# Altium PCB POWER_PCB_v2.PcbDoc (part 1 of 2)
Units mm, origin at the board's own origin, x right, y up, seen from the top; angles counter-clockwise.
Board outline 44.96 x 8.26 mm, 4 copper layers (Top Layer, Layer 1, Layer 2, Bottom Layer), stack 0.797 mm thick; 88 components, 59 nets, 290 pads, 126 vias.
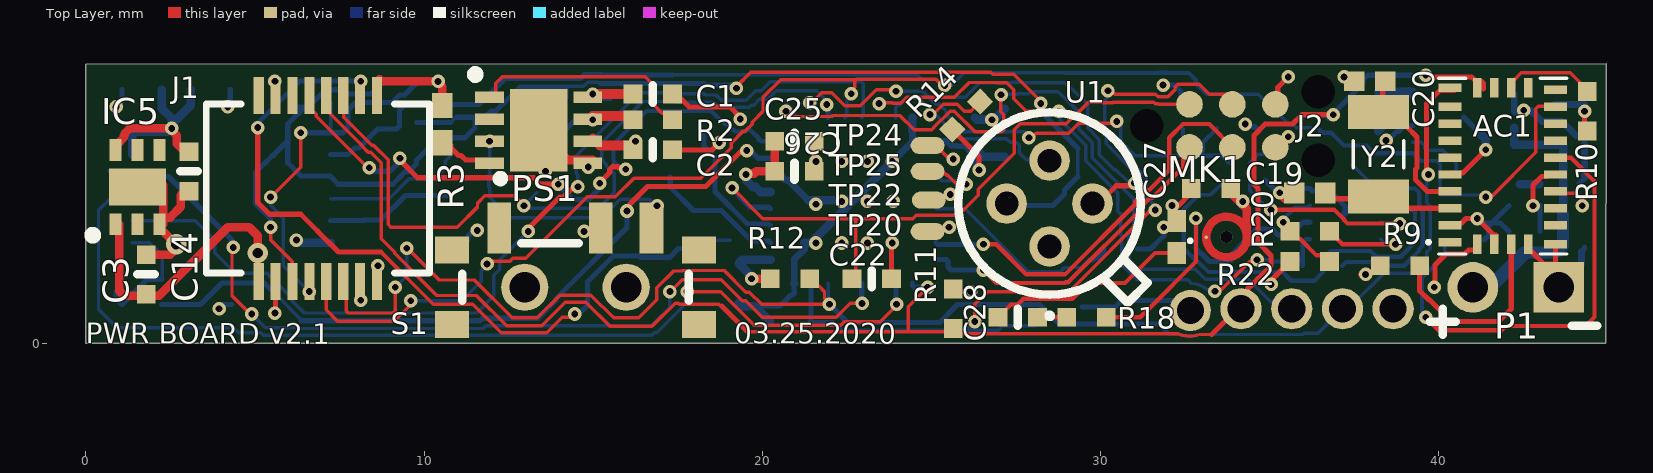
[diagram p0: Top Layer view]
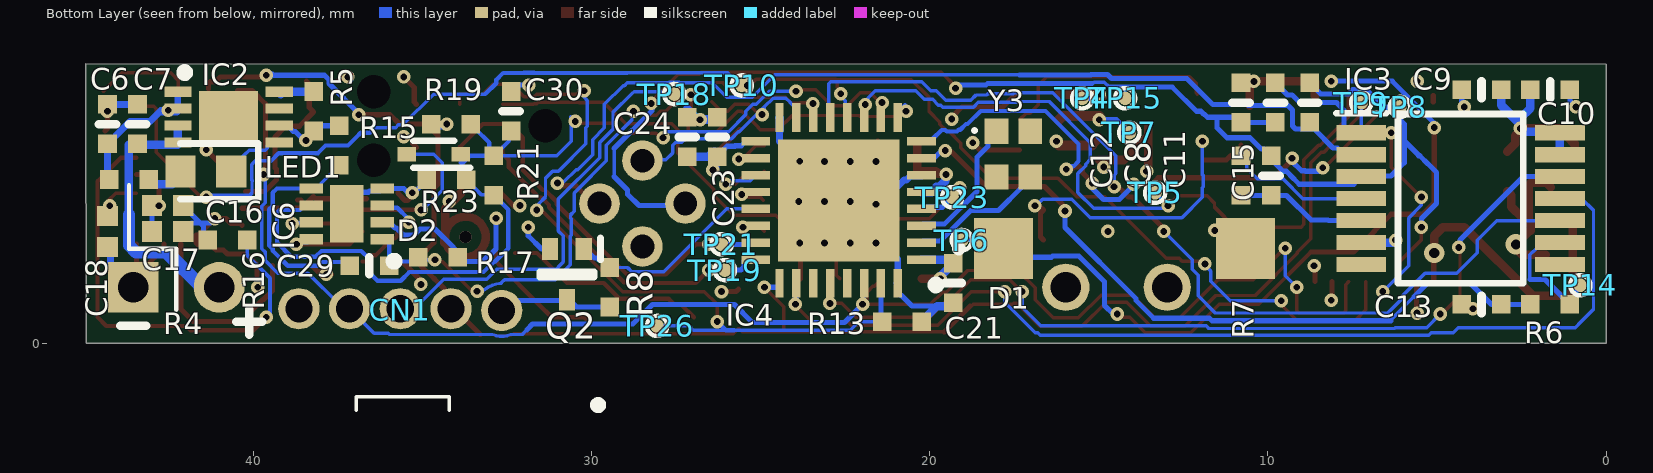
[diagram p1: Bottom Layer view, seen from below]
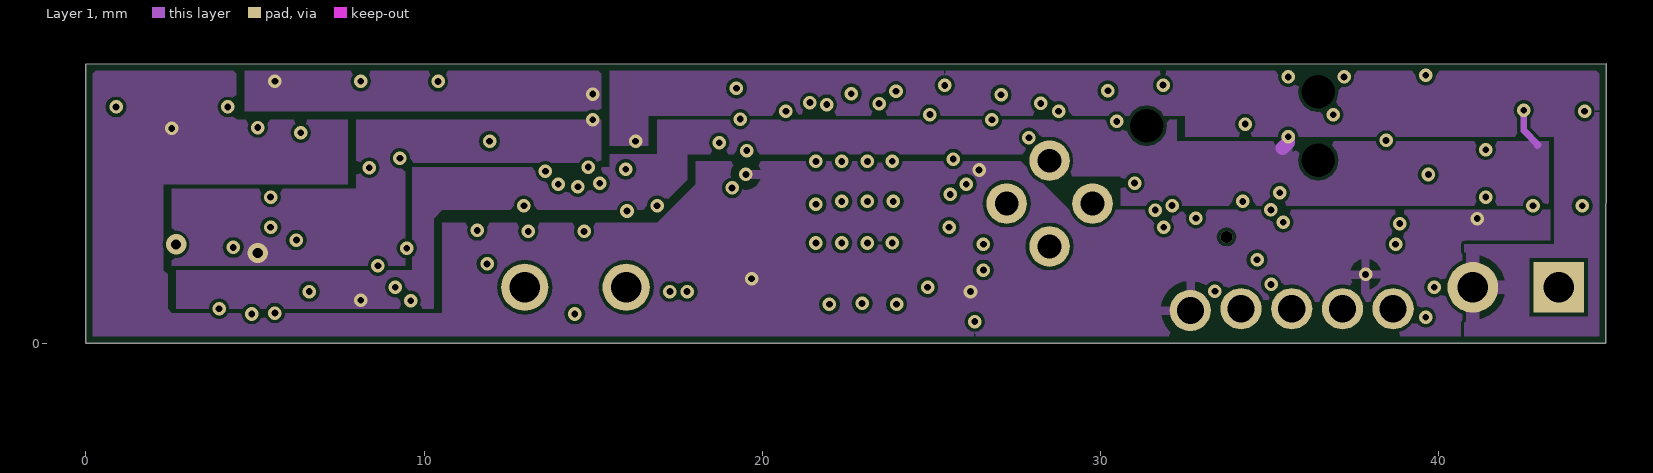
[diagram p2: Layer 1]
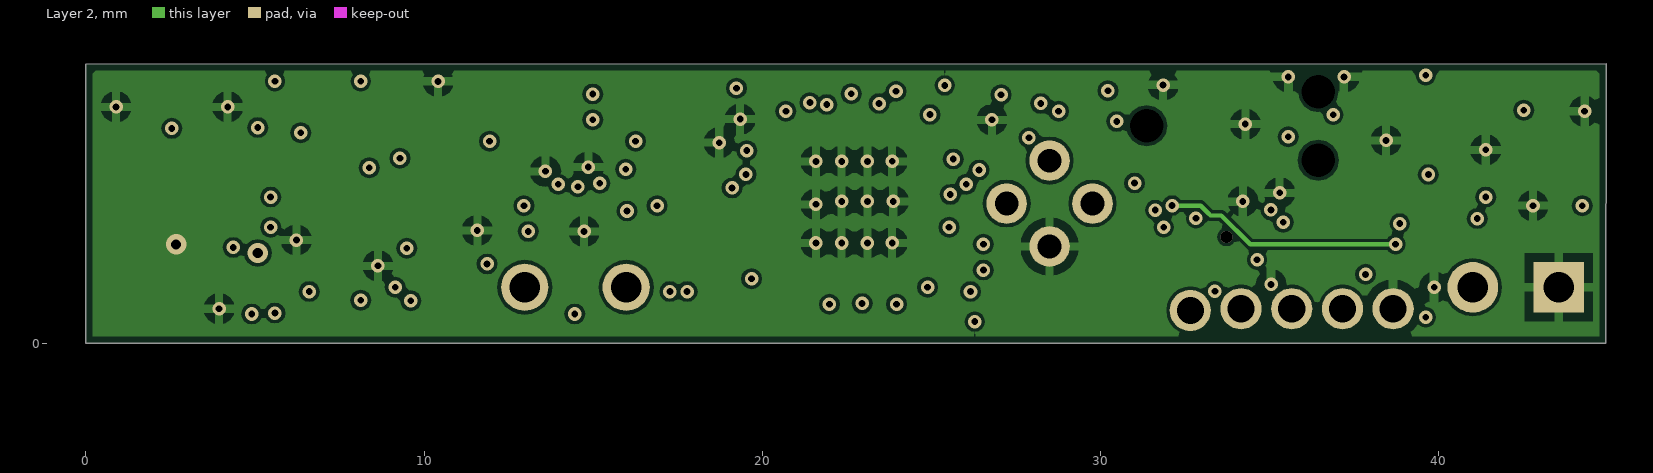
[diagram p3: Layer 2]
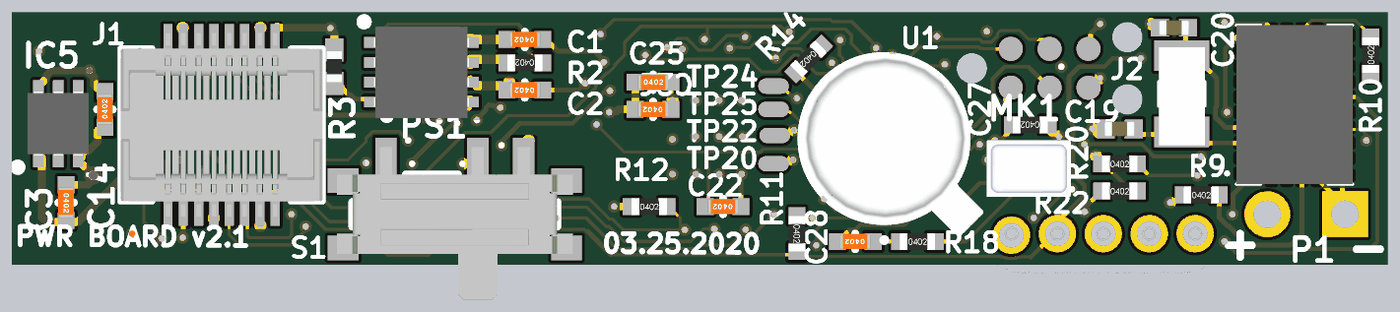
[diagram p5: 3D render of the assembled board from above, using the file's embedded part models]
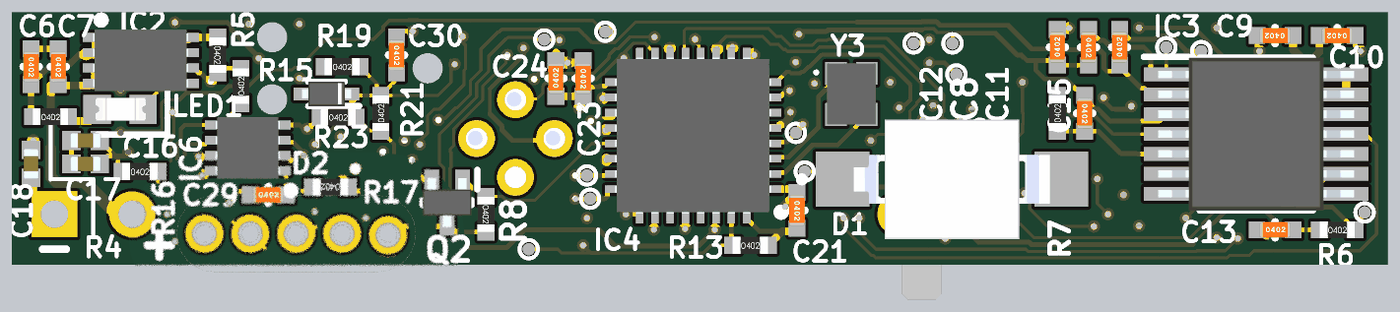
[diagram p6: 3D render of the assembled board from below, using the file's embedded part models]

## Layer stack, top to bottom
Top Solder: solder mask 0.0102, Solder Resist, Dk 3.5
Top Layer: signal copper 0.0356
Dielectric 2: prepreg 0.168, PP-006, Dk 4.1
Layer 1: signal copper 0.035
Dielectric 1: dielectric 0.32, FR-4, Dk 4.8
Layer 2: signal copper 0.035
Dielectric 3: prepreg 0.168, PP-006, Dk 4.1
Bottom Layer: signal copper 0.0356
Bottom Solder: solder mask 0.0102, Solder Resist, Dk 3.5

## Board outline
0,0 0,8.255 44.959,8.255 44.956,0

## Design rules (kind name [scope] priority, off if disabled: settings)
BoardOutlineClearance [All] p1: gap=0.2 ignorepadtopadclearanceinfootprint=FALSE
Clearance [All] p1: gap=0.102 ignorepadtopadclearanceinfootprint=FALSE except(0: Arc-Hole Track-Hole SMDPad-Hole THPad-Hole Via-Hole Fill-Hole Poly-Hole Region-Hole Text-Hole)
PlaneConnect PlaneConnect_1 [InNet('3.3V_PWR') or InNet('VBAT') or InNet('GND') or InNet('VBAT_MUX') or InNet('VBAT_2')] p1: planeconnectstyle=Direct reliefexpansion=0.508 reliefentries=4 reliefconductorwidth=0.254 reliefairgap=0.254
PlaneConnect [All] p2: planeconnectstyle=Relief reliefexpansion=0.508 reliefentries=4 reliefconductorwidth=0.254 reliefairgap=0.254
PolygonConnect [All] p1: connectstyle=Relief reliefconductorwidth=0.254 reliefentries=4 polygonreliefangle="90 Angle" airgapwidth=0.254
RoutingVias [All] p1: holewidth=0.2 width=0.4 viastyle="Through Hole" minholewidth=0.2 minwidth=0.4 maxholewidth=0.711 maxwidth=1.27
SolderMaskExpansion [All] p1: expansion=0.102 istentingtop=FALSE
Width PWR [InNet('GND') OR InNet('3.3V_PWR')OR InNet('5V') OR InNet('VBAT_MUX')OR InNet('VBAT_1')OR InNet('VBAT_2')] p1: maxlimit=0.356 minlimit=0.152 preferedwidth=0.254 minimp=50.000000 maximp=50.000000 favimp=50.000000
Width [All] p2: maxlimit=0.356 minlimit=0.102 preferedwidth=0.152 midlayer1_maxwidth=0.254 midlayer2_maxwidth=0.254 minimp=50.000000 maximp=50.000000 favimp=50.000000
29 further rules are at their usual default settings.

## Classes and differential pairs
component class Sch_MCU: C21 C22 C23 C24 C25 C26 IC4 J1 J2 R11 R12 R13 TP5 TP6 TP7 TP8 TP9 TP10 TP18 TP19 TP20 TP21 TP22 TP23 TP24 TP25 TP26 Y3
component class sch_sensors: AC1 C8 C9 C10 C11 C12 C13 C15 C16 C17 C18 C19 C20 C27 C28 C29 C30 D1 D2 IC3 IC6 MK1 R6 R7 R9 R10 R14 R15 R16 R17 R18 R19 R20 R21 R22 R23 TP14 TP15 U1 Y2
component class Sch_pwr_sys: C1 C2 C3 C6 C7 C14 CN1 IC2 IC5 LED1 P1 PS1 Q2 R2 R3 R4 R5 R8 S1 TP4

## Components (designator, comment, footprint, x,y, rotation, side; value= is the part's Value field where it differs from the comment)
AC1 "BNO080" BNO080 41.731,5.236 r180 top
C1 "0.10µF" SMD-0402C 16.764,7.366 r90 top
C2 "0.10µF" SMD-0402C 16.764,5.715 r90 top
C3 "1µF" SMD-0402C 1.778,2.032 r180 top
C6 "4.7µF" SMD-0402C 44.323,6.477 r0 bottom
C7 "4.7µF" SMD-0402C 43.434,6.477 r0 bottom
C8 "10000pF" SMD-0402C 9.779,7.112 r0 bottom
C9 "10000pF" SMD-0402C 3.683,7.493 r90 bottom
C10 "10µF" SMD-0402C 1.651,7.493 r90 bottom
C11 "10000pF" SMD-0402C 8.763,7.112 r180 bottom
C12 "10000pF" SMD-0402C 10.795,7.112 r180 bottom
C13 "1µF" SMD-0402C 3.683,1.143 r270 bottom
C14 "1µF" SMD-0402C 3.048,5.08 r0 top
C15 "6800pF" SMD-0402C 9.906,4.953 r0 bottom
C16 "0.10µF" CAPC1005X55N#1 42.545,4.064 r0 bottom
C17 "0.10µF" CAPC1005X55N#1 42.545,3.302 r0 bottom
C18 "0.10µF" CAPC1005X55N#1 44.323,3.302 r270 bottom
C19 "15pF" CAPC1005X55N#1 36.195,4.445 r180 top
C20 "15pF" CAPC1005X55N#2 37.973,7.747 r180 top
C21 "0.10µF" SMD-0402C 19.304,1.778 r0 bottom
C22 "0.10µF" SMD-0402C 23.241,1.905 r90 top
C23 "4.7µF" SMD-0402C 26.289,6.096 r0 bottom
C24 "0.10µF" SMD-0402C 27.178,6.096 r180 bottom
C25 "10000pF" SMD-0402C 20.955,5.969 r270 top
C26 "1µF" SMD-0402C 20.955,5.08 r90 top
C27 "1µF" SMD-0402-RES 33.274,4.572 r90 top
C28 "4.7µF" SMD-0402C 27.559,0.762 r90 top
C29 "4.7µF" SMD-0402C 36.576,2.286 r270 bottom
C30 "10µF" SMD-0402C 32.385,6.858 r0 bottom
CN1 "XNT-005MF-05A" XNT-005MF-05A 35.663,1.016 r0 bottom
D1 "VBPW34FASR" VBPW34FASR 14.243,2.794 r180 bottom
D2 "1N4148X-TP" SODFL1608X70N 34.671,5.588 r0 bottom
IC2 "MCP73831T-2ACI_MC" SON50P300X200X100-9N-D 40.743,6.684 r180 bottom
IC3 "LMP91051MT_NOPB" SOP65P640X120-14N 4.301,4.273 r180 bottom
IC4 "STM32F301K6U6" QFN50P500X500X60-33N-D 22.696,4.219 r0 bottom
IC5 "MCP1700T-3302E_MAY" SON65P200X200X90-7N 1.524,4.615 r90 top
IC6 "TLV9062IDSGT" SON50P200X200X80-9N 37.245,3.822 r0 bottom
J1 "54722-0164" 54722-0164 6.858,4.572 r180 top
J2 "TC2030-CTX-NL" TC2030MCPNL10 33.909,6.223 r0 top
LED1 "SML-E12M8WT86" LEDC1608X46N 41.414,5.08 r0 bottom
MK1 "SPV1840LR5H-B" *MIC_SPV1840LR5H-B 33.734,3.141 r90 top
P1 "Header 2" HDR1X2 43.561,1.651 r180 top
PS1 "TPS2115ADRBR" SON65P300X300X100-9N-D 13.388,6.294 r0 top
Q2 "RE1C002ZPTL" SOTFL50P160X85-3N 30.734,2.032 r270 bottom
R2 "1M" SMD-0402-RES 16.764,6.604 r90 top
R3 "750" RESC1005X40N 10.541,6.477 r270 top
R4 "110" SMD-0402-RES 43.688,4.838 r270 bottom
R5 "17.4k" SMD-0402-RES 38.227,6.858 r0 bottom
R6 "1k" SMD-0402-RES 1.651,1.143 r270 bottom
R7 "160k" SMD-0402-RES 10.795,4.953 r180 bottom
R8 "1M" SMD-0402-RES 29.464,1.651 r0 bottom
R9 "10k" SMD-0402-RES 38.862,2.286 r270 top
R10 "0" SMD-0402-RES 44.399,6.858 r0 top
R11 "10k" SMD-0402-RES 25.654,1.016 r180 top
R12 "10k" SMD-0402-RES 20.828,1.905 r270 top
R13 "10k" SMD-0402-RES 20.828,0.635 r270 bottom
R14 "100k" SMD-0402-RES 26.035,6.731 r135 top
R15 "4.7k" SMD-0402-RES 37.465,5.842 r180 bottom
R16 "10k" SMD-0402-RES 40.767,3.048 r270 bottom
R17 "100k" SMD-0402-RES 34.544,2.54 r90 bottom
R18 "4.7k" SMD-0402-RES 29.591,0.762 r270 top
R19 "100k" SMD-0402-RES 34.163,6.477 r270 bottom
R20 "100k" SMD-0402-RES 36.195,3.302 r270 top
R21 "100k" SMD-0402-RES 32.893,4.953 r180 bottom
R22 "100k" SMD-0402-RES 36.195,2.413 r270 top
R23 "51.1k" SMD-0402-RES 34.29,4.826 r270 bottom
S1 "PCM12SMTR" PCM12SMTR_1 14.478,1.651 r0 top
TP4 "TestPoint" TESTPOINT_0.4MM 15.494,7.239 r90 bottom
TP5 "TestPoint" TESTPOINT_0.4MM 13.335,4.445 r90 bottom
TP6 "TestPoint" TESTPOINT_0.4MM 19.05,3.048 r90 bottom
TP7 "TestPoint" TESTPOINT_0.4MM 14.097,6.223 r90 bottom
TP8 "TestPoint" TESTPOINT_0.4MM 6.096,6.985 r90 bottom
TP9 "TestPoint" TESTPOINT_0.4MM 7.239,7.112 r90 bottom
TP10 "TestPoint" TESTPOINT_0.4MM 25.565,7.62 r90 bottom
TP14 "TestPoint" TESTPOINT_0.4MM 0.76,1.71 r90 bottom
TP15 "TestPoint" TESTPOINT_0.4MM 14.224,7.239 r90 bottom
TP18 "TestPoint" TESTPOINT_0.4MM 27.559,7.366 r90 bottom
TP19 "TestPoint" TESTPOINT_0.4MM 26.063,2.159 r90 bottom
TP20 "TestPoint" TESTPOINT_1MM_OVAL 24.892,3.302 r90 top
TP21 "TestPoint" TESTPOINT_0.4MM 26.162,2.921 r90 bottom
TP22 "TestPoint" TESTPOINT_1MM_OVAL 24.93,4.229 r90 top
TP23 "TestPoint" TESTPOINT_0.4MM 19.338,4.314 r90 bottom
TP24 "TestPoint" TESTPOINT_1MM_OVAL 24.892,5.08 r90 top
TP25 "TestPoint" TESTPOINT_1MM_OVAL 24.892,5.842 r90 top
TP26 "TestPoint" TESTPOINT_0.4MM 28.067,0.508 r90 bottom
U1 "ZTP-135SR" ZTP-135SR 28.5,4.127 r180 top
Y2 "FC-135_32.7680KA-A5" FC135327680KAAG0 38.227,5.588 r90 top
Y3 "XRCGB32M000F1H01R0" XRCGB32M000F1H01R0 17.526,5.588 r270 bottom

## Footprints (in the part's own frame and the unit in brackets; to place one, negate y for a bottom-side part, rotate by r counter-clockwise, add the part's x,y. Pads: shape width x height; smd on the part's side, far side on the other; paste and mask are expansions set on the pad)
54722-0164 [mm]
  rect 0.3x1.1 smd: 1(-1.75,-2.75) 2(-1.75,2.75) 3(-1.25,-2.75) 4(-1.25,2.75) 5(-0.75,-2.75) 6(-0.75,2.75) 7(-0.25,-2.75) 8(-0.25,2.75) 9(0.25,-2.75) 10(0.25,2.75) 11(0.75,-2.75) 12(0.75,2.75) 13(1.25,-2.75) 14(1.25,2.75) 15(1.75,-2.75) 16(1.75,2.75)
  silkscreen extent -3.3,-2.5 3.3,2.5, body extent -3.3,-3 3.3,3, height 1.18
*MIC_SPV1840LR5H-B [mm]
  rect 0.65x0.545 smd: 1(0.473,1.477) 2(-0.474,1.476)
  round 0.1 smd paste-140 mask+0: 3(-0.01,0.6)
  Top Layer circle w0.25: c0,0 r0.6
  body extent -0.92,-0.87 0.93,1.88, height 0.9
BNO080 [mm]
  rect 0.675x0.25 smd: 1(1.387,2.25) 6(-1.738,2.313) 7(-1.738,1.75) 8(-1.738,1.25) 9(-1.738,0.75) 10(-1.738,0.25) 11(-1.738,-0.25) 12(-1.738,-0.75) 13(-1.738,-1.25) 14(-1.738,-1.75) 15(-1.738,-2.263) 20(1.387,-2.313) 21(1.387,-1.75) 22(1.387,-1.25) 23(1.387,-0.75) 24(1.387,-0.25) 25(1.387,0.25) 26(1.387,0.75) 27(1.387,1.25) 28(1.387,1.75)
  rect 0.25x0.575 smd: 2(0.575,2.313) 3(0.075,2.313) 4(-0.425,2.313) 5(-0.925,2.313) 16(-0.925,-2.313) 17(-0.425,-2.313) 18(0.075,-2.313) 19(0.575,-2.313)
  silkscreen extent -2.07,-2.6 2.07,2.6, body extent -2.07,-2.6 1.73,2.6, height 1.28
CAPC1005X55N#1 [mm]
  rect 0.6x0.62 smd: 1(-0.46,0) 2(0.46,0)
  body extent -0.5,-0.25 0.5,0.25, height 0.55
CAPC1005X55N#2 [mm]
  rect 0.6x0.569 smd: 1(-0.46,0) 2(0.46,0)
  body extent -0.5,-0.25 0.5,0.25, height 0.55
FC135327680KAAG0 [mm]
  rect 1x1.8 smd: 1(-1.25,0) 2(1.25,0)
  silkscreen extent -0.4,-0.75 0.4,0.75, body extent -1.68,-0.76 1.52,0.74, height 0.9
HDR1X2 [mm] "Connector; Header; 2 Position"
  rect 1.5x1.5 hole 0.9: 1(0,0)
  round 1.5 hole 0.9: 2(2.54,0)
LEDC1608X46N [mm]
  rect 0.9x0.95 smd: 1(-0.75,0) 2(0.75,0)
  silkscreen extent -1.55,-0.82 0.75,0.82, body extent -0.84,-0.37 0.81,0.36, height 0.68
PCM12SMTR_1 [mm]
  rect 0.7x1.5 smd: 1(-2.25,1.75) 2(0.75,1.75) 3(2.25,1.75)
  rect 1x0.8 smd: 4(-3.65,1.1) 5(-3.65,-1.1) 6(3.65,1.1) 7(3.65,-1.1)
  round 1.4 hole 0.9: 8(-1.5,0) 9(1.5,0)
  silkscreen extent -3.35,-0.4 3.35,3.32, body extent -3.85,-2.8 3.85,2.2, height 1.4
QFN50P500X500X60-33N-D [mm]
  rect 0.85x0.25 smd: 1(-2.45,1.75) 2(-2.45,1.25) 3(-2.45,0.75) 4(-2.45,0.25) 5(-2.45,-0.25) 6(-2.45,-0.75) 7(-2.45,-1.25) 8(-2.45,-1.75) 17(2.45,-1.75) 18(2.45,-1.25) 19(2.45,-0.75) 20(2.45,-0.25) 21(2.45,0.25) 22(2.45,0.75) 23(2.45,1.25) 24(2.45,1.75)
  rect 0.25x0.85 smd: 9(-1.75,-2.45) 10(-1.25,-2.45) 11(-0.75,-2.45) 12(-0.25,-2.45) 13(0.25,-2.45) 14(0.75,-2.45) 15(1.25,-2.45) 16(1.75,-2.45) 25(1.75,2.45) 26(1.25,2.45) 27(0.75,2.45) 28(0.25,2.45) 29(-0.25,2.45) 30(-0.75,2.45) 31(-1.25,2.45) 32(-1.75,2.45)
  rect 3.6x3.6 smd: 33(0,0)
  silkscreen extent -3,2.38 -2.75,2.62, body extent -2.55,-2.55 2.55,2.55, height 0.6
RESC1005X40N [mm]
  rect 0.75x0.6 smd: 1(-0.55,0) 2(0.55,0)
  body extent -0.5,-0.25 0.5,0.25, height 0.4
SMD-0402-RES [mm]
  rect 0.55x0.55 smd: 1(0,0.584) 2(0,-0.584)
  body extent -0.28,-0.57 0.27,0.58, height 0.41
SMD-0402C [mm]
  rect 0.55x0.55 smd: 1(0,0.584) 2(0,-0.584)
  silkscreen extent -0.25,0 0.25,0, body extent -0.25,-0.51 0.25,0.51, height 0.51
SODFL1608X70N [mm]
  rect 0.54x0.42 smd: 1(-0.8,0) 2(0.8,0)
  silkscreen extent -1.07,-0.4 0.6,0.4, body extent -0.8,-0.4 0.8,0.4, height 0.7
SON50P200X200X80-9N [mm]
  rect 0.7x0.3 smd: 1(-1.05,0.75) 2(-1.05,0.25) 3(-1.05,-0.25) 4(-1.05,-0.75) 5(1.05,-0.75) 6(1.05,-0.25) 7(1.05,0.25) 8(1.05,0.75)
  rect 1x1.7 smd: 9(0,0)
  silkscreen extent -1.52,1.28 -1.27,1.52, body extent -1.05,-1 1.05,1, height 0.8
SON50P300X200X100-9N-D [mm]
  rect 0.8x0.3 smd: 1(-1.5,0.75) 2(-1.5,0.25) 3(-1.5,-0.25) 4(-1.5,-0.75) 5(1.5,-0.75) 6(1.5,-0.25) 7(1.5,0.25) 8(1.5,0.75)
  rect 1.75x1.55 smd: 9(0,0)
  silkscreen extent -1.42,1.19 -1.17,1.44, body extent -1.55,-1 1.55,1, height 1
SON65P200X200X90-7N [mm]
  rect 0.65x0.35 smd: 1(-1.1,0.65) 2(-1.1,0) 3(-1.1,-0.65) 4(1.1,-0.65) 5(1.1,0) 6(1.1,0.65)
  rect 1.1x1.7 smd: 7(0,0)
  silkscreen extent -1.55,1.2 -1.3,1.45, body extent -1.05,-1 1.05,1, height 0.9
SON65P300X300X100-9N-D [mm]
  rect 0.85x0.35 smd: 1(-1.45,0.975) 2(-1.45,0.325) 3(-1.45,-0.325) 4(-1.45,-0.975) 5(1.45,-0.975) 6(1.45,-0.325) 7(1.45,0.325) 8(1.45,0.975)
  rect 1.7x2.45 smd: 9(0,0)
  silkscreen extent -2,1.53 -1.75,1.77, body extent -1.55,-1.5 1.55,1.5, height 1
SOP65P640X120-14N [mm]
  rect 1.475x0.45 smd: 1(-2.938,1.95) 2(-2.938,1.3) 3(-2.938,0.65) 4(-2.938,0) 5(-2.938,-0.65) 6(-2.938,-1.3) 7(-2.938,-1.95) 8(2.938,-1.95) 9(2.938,-1.3) 10(2.938,-0.65) 11(2.938,0) 12(2.938,0.65) 13(2.938,1.3) 14(2.938,1.95)
  silkscreen extent -3.67,-2.5 1.85,2.52, body extent -3.2,-2.5 3.2,2.5, height 1.2
SOTFL50P160X85-3N [mm]
  rect 0.645x0.48 smd: 1(-0.752,0.5) 2(-0.752,-0.5) 3(0.752,0)
  silkscreen extent -1.07,-0.8 0.08,0.99, body extent -0.8,-0.8 0.8,0.8, height 0.85
TC2030MCPNL10 [mm]
  round 0.787 smd: 1(-1.27,-0.434) 2(-1.27,0.836) 3(0,-0.434) 4(0,0.836) 5(1.27,-0.434) 6(1.27,0.836)
  round 0.495 hole 0.991 unplated: 7(-2.54,0.201) 8(2.54,1.217) 9(2.54,-0.815)
  silkscreen extent -1.3,-3.25 -1.2,-3.15
TESTPOINT_0.4MM [mm]
  round 0.4 smd: 1(0,0)
  silkscreen extent -0.3,-0.3 0.3,0.3
TESTPOINT_1MM_OVAL [mm]
  oval 0.5x1 smd: 1(0,0)
VBPW34FASR [mm]
  rect 1.75x1.8 smd: 1(-3.575,0) 2(3.575,0)
  silkscreen extent -5,-0.1 -4.8,0.1, body extent -3.2,-1.95 3.2,1.95, height 1.51
XNT-005MF-05A [mm]
  round 1.219 hole 0.8: 1(-3,0.05) 2(-1.5,0) 3(0,0) 4(1.5,0) 5(3,0)
  silkscreen extent -5.96,2.6 1.3,3, body extent -5.5,-2.65 5.5,2.65, height 3.65
XRCGB32M000F1H01R0 [mm]
  rect 0.75x0.7 smd: 1(-0.675,-0.5) 2(0.675,-0.5) 3(0.675,0.5) 4(-0.675,0.5)
  silkscreen extent -0.75,-1.2 -0.65,-1.1, body extent -1,-0.8 1,0.8, height 0.8
ZTP-135SR [mm]
  round 1.2 hole 0.7: 1(0,1.27) 2(1.27,0) 3(0,-1.27) 4(-1.27,0)
  silkscreen extent -2.9,-2.7 2.7,3.35, body extent -3.24,-2.79 2.74,3.19, height 2.67

## Part data
AC1: "Accelerometer", Manufacturer_Name="Hillcrest Laboratories", Datasheet Link=http://www.hillcrestlabs.com/download/5a05f340566d07c196001ec1, Height=1.18mm, Manufacturer_Part_Number=BNO080
C1 C2 C16 C17 C18 C21 C22 C24: library part GCM155R71C104KA55D, "CAP CER 0.1UF 16V X7R 0402", Digi-Key Part Number=490-4759-1-ND, Manufacturer="Murata Electronics North America", Operating Temperature="-55°C ~ 125°C", Package / Case="0402 (1005 Metric)", Ratings=AEC-Q200, Temperature Coefficient=X7R, Tolerance=±10%, Voltage=16V, @ qty=0, Applications=Automotive, Datasheets=http://www.murata.com/~/media/webrenewal/support/library/catalog/products/capacitor/mlcc/c03e.ashx, Factory Stock=0, Features=-, Height - Seated (Max)=-, Image=//media.digikey.com/Renders/Murata%20Renders/ZRB-SERIES-0402.jpg, Lead Spacing=-, Lead Style=-, Minimum Quantity=1, Mounting Type="Surface Mount, MLCC", Packaging="Cut Tape (CT)", Part Number=GCM155R71C104KA55D, Part Status=Active, Quantity Available=734194, Series=GCM, Size / Dimension="0.039\" L x 0.020\" W (1.00mm x 0.50mm)", Thickness (Max)="0.022\" (0.55mm)", Unit Price (USD)=0.1
C3 C13 C14 C26 C27: library part GCM155C71A105KE38D, "CAP CER 1UF 10V X7S 0402", Digi-Key Part Number=490-13409-1-ND, Manufacturer="Murata Electronics North America", Operating Temperature="-55°C ~ 125°C", Package / Case="0402 (1005 Metric)", Ratings=AEC-Q200, Temperature Coefficient=X7S, Tolerance=±10%, Voltage=10V, @ qty=0, Applications=Automotive, Datasheets=http://www.murata.com/~/media/webrenewal/support/library/catalog/products/capacitor/mlcc/c03e.ashx, Factory Stock=0, Features=-, Height - Seated (Max)=-, Image=//media.digikey.com/Renders/Murata%20Renders/ZRB-SERIES-0402.jpg, Lead Spacing=-, Lead Style=-, Minimum Quantity=1, Mounting Type="Surface Mount, MLCC", Packaging="Cut Tape (CT)", Part Number=GCM155C71A105KE38D, Part Status=Active, Quantity Available=7240, Series=GCM, Size / Dimension="0.039\" L x 0.020\" W (1.00mm x 0.50mm)", Thickness (Max)="0.022\" (0.55mm)", Unit Price (USD)=0.12
C6 C7 C23 C28 C29: library part GRM153R60G475ME15D, "CAP CER 4.7UF 4V X5R 0402", Digi-Key Part Number=490-13231-1-ND, Manufacturer="Murata Electronics North America", Operating Temperature="-55°C ~ 85°C", Package / Case="0402 (1005 Metric)", Ratings=-, Temperature Coefficient=X5R, Tolerance=±20%, Voltage=4V, @ qty=0, Applications="General Purpose", Datasheets=http://psearch.en.murata.com/capacitor/product/GRM153R60G475ME15%23.pdf, Factory Stock=0, Features=-, Height - Seated (Max)=-, Image=//media.digikey.com/Renders/Murata%20Renders/ZRB-SERIES-0402.jpg, Lead Spacing=-, Lead Style=-, Minimum Quantity=1, Mounting Type="Surface Mount, MLCC", Packaging="Cut Tape (CT)", Part Number=GRM153R60G475ME15D, Part Status=Active, Quantity Available=9100, Series=GRM, Size / Dimension="0.039\" L x 0.020\" W (1.00mm x 0.50mm)", Thickness (Max)="0.013\" (0.33mm)", Unit Price (USD)=0.27
C8 C9 C11 C12 C25: library part GCM155R71H103KA55D, "CAP CER 10000PF 50V X7R 0402", Digi-Key Part Number=490-4762-1-ND, Manufacturer="Murata Electronics North America", Operating Temperature="-55°C ~ 125°C", Package / Case="0402 (1005 Metric)", Ratings=AEC-Q200, Temperature Coefficient=X7R, Tolerance=±10%, Voltage=50V, @ qty=0, Applications=Automotive, Datasheets=http://www.murata.com/~/media/webrenewal/support/library/catalog/products/capacitor/mlcc/c03e.ashx, Factory Stock=0, Features=-, Height - Seated (Max)=-, Image=//media.digikey.com/Renders/Murata%20Renders/ZRB-SERIES-0402.jpg, Lead Spacing=-, Lead Style=-, Minimum Quantity=1, Mounting Type="Surface Mount, MLCC", Packaging="Cut Tape (CT)", Part Number=GCM155R71H103KA55D, Part Status=Active, Quantity Available=650067, Series=GCM, Size / Dimension="0.039\" L x 0.020\" W (1.00mm x 0.50mm)", Thickness (Max)="0.022\" (0.55mm)", Unit Price (USD)=0.1
C10 C30: library part GRJ155R60J106ME11D, "CAP CER 10UF 6.3V X5R 0402", Digi-Key Part Number=490-13211-1-ND, Manufacturer="Murata Electronics North America", Operating Temperature="-55°C ~ 85°C", Package / Case="0402 (1005 Metric)", Ratings=-, Temperature Coefficient=X5R, Tolerance=±20%, Voltage=6.3V, @ qty=0, Applications="Boardflex Sensitive", Datasheets=http://psearch.en.murata.com/capacitor/product/GRJ155R60J106ME11%23.pdf, Factory Stock=0, Features="Derating Recommended, Soft Termination", Height - Seated (Max)=-, Image=//media.digikey.com/Renders/Murata%20Renders/ZRB-SERIES-0402.jpg, Lead Spacing=-, Lead Style=-, Minimum Quantity=1, Mounting Type="Surface Mount, MLCC", Packaging="Cut Tape (CT)", Part Number=GRJ155R60J106ME11D, Part Status=Active, Quantity Available=64064, Series=GRJ, Size / Dimension="0.039\" L x 0.020\" W (1.00mm x 0.50mm)", Thickness (Max)="0.028\" (0.70mm)", Unit Price (USD)=0.23
C15: library part GRM155R71E682KA01J, "CAP CER 6800PF 25V X7R 0402", Digi-Key Part Number=490-11422-1-ND, Manufacturer="Murata Electronics North America", Operating Temperature="-55°C ~ 125°C", Package / Case="0402 (1005 Metric)", Ratings=-, Temperature Coefficient=X7R, Tolerance=±10%, Voltage=25V, @ qty=0, Applications="General Purpose", Datasheets=http://www.murata.com/~/media/webrenewal/support/library/catalog/products/capacitor/mlcc/c02e.pdf, Factory Stock=0, Features=-, Height - Seated (Max)=-, Image=//media.digikey.com/Renders/Murata%20Renders/ZRB-SERIES-0402.jpg, Lead Spacing=-, Lead Style=-, Minimum Quantity=1, Mounting Type="Surface Mount, MLCC", Packaging="Cut Tape (CT)", Part Number=GRM155R71E682KA01J, Part Status=Active, Quantity Available=44380, Series=GRM, Size / Dimension="0.039\" L x 0.020\" W (1.00mm x 0.50mm)", Thickness (Max)="0.022\" (0.55mm)", Unit Price (USD)=0.1
C19 C20: library part GCM1555C1H150JA16D, "CAP CER 15PF 50V NP0 0402", Digi-Key Part Number=490-11147-1-ND, Manufacturer="Murata Electronics North America", Operating Temperature="-55°C ~ 125°C", Package / Case="0402 (1005 Metric)", Ratings=AEC-Q200, Temperature Coefficient="C0G, NP0", Tolerance=±5%, Voltage=50V, @ qty=0, Applications=Automotive, Datasheets=http://www.murata.com/~/media/webrenewal/support/library/catalog/products/capacitor/mlcc/c03e.ashx, Factory Stock=0, Features=-, Height - Seated (Max)=-, Image=//media.digikey.com/Renders/Murata%20Renders/ZRB-SERIES-0402.jpg, Lead Spacing=-, Lead Style=-, Minimum Quantity=1, Mounting Type="Surface Mount, MLCC", Packaging="Cut Tape (CT)", Part Number=GCM1555C1H150JA16D, Part Status=Active, Quantity Available=6185, Series=GCM, Size / Dimension="0.039\" L x 0.020\" W (1.00mm x 0.50mm)", Thickness (Max)="0.022\" (0.55mm)", Unit Price (USD)=0.1
D1: "Diode", Manufacturer_Name=Vishay, Mouser Part Number=782-VBPW34FASR, RS Part Number=7689401, Datasheet Link=https://www.vishay.com/docs/81127/vbpw34fa.pdf, Height=1.3mm, Manufacturer_Part_Number=VBPW34FASR, Mouser Price/Stock=https://www.mouser.com/Search/Refine.aspx?Keyword=782-VBPW34FASR, RS Price/Stock=https://uk.rs-online.com/web/p/products/7689401
D2: "Diode", Manufacturer_Name="Micro Commercial Components (MCC)", Mouser Part Number=833-1N4148X-TP, Datasheet Link=http://www.mouser.com/ds/2/258/1N4148X(SOD-523)-349105.pdf, Height=0.7mm, Manufacturer_Part_Number=1N4148X-TP, Mouser Price/Stock=https://www.mouser.com/Search/Refine.aspx?Keyword=833-1N4148X-TP
IC2: "Integrated Circuit", Manufacturer_Name=Microchip, Manufacturer_Part_Number=MCP73831T-2ACI/MC, Mouser Part Number=579-MCP73831T-2ACIMC, Allied_Number=70452042, Allied Price/Stock=https://www.alliedelec.com/microchiptechnologyinc-mcp73831t-2aci-mc/70452042/, Datasheet Link=http://ww1.microchip.com/downloads/en/DeviceDoc/20001984g.pdf, Height=1mm, Mouser Price/Stock=https://www.mouser.com/Search/Refine.aspx?Keyword=579-MCP73831T-2ACIMC
IC3: "Integrated Circuit", Manufacturer_Name="Texas Instruments", Manufacturer_Part_Number=LMP91051MT/NOPB, Mouser Part Number=595-LMP91051MT/NOPB, Datasheet Link=http://www.ti.com/lit/ds/symlink/lmp91051.pdf, Height=1.2mm, Mouser Price/Stock=https://www.mouser.com/Search/Refine.aspx?Keyword=595-LMP91051MT%2FNOPB
IC4: "Integrated Circuit", Manufacturer_Name=STMicroelectronics, Mouser Part Number=511-STM32F301K6U6, Datasheet Link=http://www.mouser.com/ds/2/389/stm32f301c6-956213.pdf, Height=0.6mm, Manufacturer_Part_Number=STM32F301K6U6, Mouser Price/Stock=https://www.mouser.com/Search/Refine.aspx?Keyword=511-STM32F301K6U6
IC5: "Integrated Circuit", Manufacturer_Name=Microchip, Manufacturer_Part_Number=MCP1700T-3302E/MAY, Mouser Part Number=579-MCP1700T3302EMAY, Allied Price/Stock=https://www.alliedelec.com/microchip-technology-inc-mcp1700t-3302e-may/70567878/, Allied_Number=70567878, Datasheet Link=http://ww1.microchip.com/downloads/en/DeviceDoc/20001826D.pdf, Height=0.9mm, Mouser Price/Stock=https://www.mouser.com/Search/Refine.aspx?Keyword=579-MCP1700T3302EMAY
IC6: "Integrated Circuit", Manufacturer_Name="Texas Instruments", Mouser Part Number=595-TLV9062IDSGT, Datasheet Link=http://www.ti.com/lit/gpn/TLV9062, Height=0.8mm, Manufacturer_Part_Number=TLV9062IDSGT, Mouser Price/Stock=https://www.mouser.com/Search/Refine.aspx?Keyword=595-TLV9062IDSGT
J1: "Connector", Manufacturer_Name=Molex, Mouser Part Number=538-54722-0164, RS Part Number=7206511, Datasheet Link=http://www.molex.com/webdocs/datasheets/pdf/en-us//0547220164_PCB_RECEPTACLES.pdf, Manufacturer_Part_Number=54722-0164, Mouser Price/Stock=https://www.mouser.com/Search/Refine.aspx?Keyword=538-54722-0164, RS Price/Stock=https://uk.rs-online.com/web/p/products/7206511
J2: "Connector", Manufacturer_Name="Tag Connect", Datasheet Link=http://www.tag-connect.com/Materials/TC2030-CTX.pdf, Height=18mm, Manufacturer_Part_Number=TC2030-CTX-NL
LED1: "LED", Manufacturer_Name="ROHM Semiconductor", Mouser Part Number=755-SML-E12M8WT86, RS Part Number=6942799, Datasheet Link=https://www.rohm.com/datasheet/SML-E12M8W/sml-e1-e, Height=0.46mm, Manufacturer_Part_Number=SML-E12M8WT86, Mouser Price/Stock=https://www.mouser.com/Search/Refine.aspx?Keyword=755-SML-E12M8WT86, RS Price/Stock=http://uk.rs-online.com/web/p/products/6942799
MK1: "Mic Mems Analog", Package="0805 Knowles", Availability=Unavailable, MF=Knowles, MP=SPV1840LR5H-B, Price=None, SnapEDA_Link=https://www.snapeda.com/parts/SPV1840LR5H-B/Knowles/view-part/?ref=snap
P1: "Header, 2-Pin", LatestRevisionDate=17-Jul-2002, LatestRevisionNote="Re-released for DXP Platform.", Publisher="Altium Limited"
PS1: "Power Supply", Manufacturer_Name="Texas Instruments", Mouser Part Number=595-TPS2115ADRBR, Datasheet Link=http://www.ti.com/lit/gpn/tps2115a, Height=1mm, Manufacturer_Part_Number=TPS2115ADRBR, Mouser Price/Stock=https://www.mouser.com/Search/Refine.aspx?Keyword=595-TPS2115ADRBR
Q2: "MOSFET (P-Channel)", Manufacturer_Name="ROHM Semiconductor", Mouser Part Number=755-RE1C002ZPTL, RS Part Number=1486960P, Datasheet Link=https://componentsearchengine.com/Datasheets/1/RE1C002ZPTL.pdf, Height=0.85mm, Manufacturer_Part_Number=RE1C002ZPTL, Mouser Price/Stock=https://www.mouser.com/Search/Refine.aspx?Keyword=755-RE1C002ZPTL, RS Price/Stock=http://uk.rs-online.com/web/p/products/1486960P
R2 R8: library part ERJ-2GEJ105X, "RES SMD 1M OHM 5% 1/10W 0402", Digi-Key Part Number=P1.0MJCT-ND, Manufacturer="Panasonic Electronic Components", Operating Temperature="-55°C ~ 155°C", Package / Case="0402 (1005 Metric)", Power (Watts)="0.1W, 1/10W", Supplier Device Package=0402, Temperature Coefficient=±200ppm/°C, Tolerance=±5%, @ qty=1500, Composition="Thick Film", Datasheets=http://industrial.panasonic.com/www-cgi/jvcr13pz.cgi?E+PZ+3+AOA0001+ERJ2GEJ105X+7+WW, Factory Stock=0, Failure Rate=-, Features="Automotive AEC-Q200", Height - Seated (Max)="0.016\" (0.40mm)", Image=//media.digikey.com/Photos/Panasonic%20Photos/ERJ-PA2-Series.jpg, Minimum Quantity=1, Number of Terminations=2, Packaging="Cut Tape (CT)", Part Number=ERJ-2GEJ105X, Part Status=Active, Quantity Available=1082572, Series=ERJ, Size / Dimension="0.039\" L x 0.020\" W (1.00mm x 0.50mm)", Unit Price (USD)=0.00350
R3: library part ERJ-2RKF7500X, "RES SMD 750 OHM 1% 1/10W 0402", Manufacturer_Name=Panasonic, Mouser Part Number=667-ERJ-2RKF7500X, Allied Price/Stock=https://www.alliedelec.com/panasonic-erj-2rkf7500x/70265602/, Allied_Number=70265602, Datasheet Link=https://industrial.panasonic.com/cdbs/www-data/pdf/RDA0000/AOA0000C86.pdf, Height=0.4mm, Manufacturer_Part_Number=ERJ-2RKF7500X
R4: library part ERJ-2RKF8062X, "RES SMD 110 OHM 5% 1/10W 0402", Digi-Key Part Number=P80.6KLCT-ND, Manufacturer="Panasonic Electronic Components", Operating Temperature="-55°C ~ 155°C", Package / Case="0402 (1005 Metric)", Power (Watts)="0.1W, 1/10W", Supplier Device Package=0402, Temperature Coefficient=±100ppm/°C, Tolerance=±5%, @ qty=1500, Composition="Thick Film", Datasheets=http://industrial.panasonic.com/www-cgi/jvcr13pz.cgi?E+PZ+3+AOA0002+ERJ2RKF8062X+7+WW, Factory Stock=0, Failure Rate=-, Features="Automotive AEC-Q200", Height - Seated (Max)="0.016\" (0.40mm)", Image=//media.digikey.com/Photos/Panasonic%20Photos/ERJ-PA2-Series.jpg, Minimum Quantity=1, Number of Terminations=2, Packaging="Cut Tape (CT)", Part Number=ERJ-2RKF8062X, Part Status=Active, Quantity Available=91747, Series=ERJ, Size / Dimension="0.039\" L x 0.020\" W (1.00mm x 0.50mm)", Unit Price (USD)=0.00496
R5: library part ERJ-2GEJ103X, "RES SMD 17.4K OHM 1% 1/10W 0402", Digi-Key Part Number=P10KJCT-ND, Manufacturer="Panasonic Electronic Components", Operating Temperature="-55°C ~ 155°C", Package / Case="0402 (1005 Metric)", Power (Watts)="0.1W, 1/10W", Supplier Device Package=0402, Temperature Coefficient=±200ppm/°C, Tolerance=±1%, @ qty=1500, Composition="Thick Film", Datasheets=http://industrial.panasonic.com/www-cgi/jvcr13pz.cgi?E+PZ+3+AOA0001+ERJ2GEJ103X+7+WW, Factory Stock=0, Failure Rate=-, Features="Automotive AEC-Q200", Height - Seated (Max)="0.016\" (0.40mm)", Image=//media.digikey.com/Photos/Panasonic%20Photos/ERJ-PA2-Series.jpg, Minimum Quantity=1, Number of Terminations=2, Packaging="Cut Tape (CT)", Part Number=ERJ-2GEJ103X, Part Status=Active, Quantity Available=2560215, Series=ERJ, Size / Dimension="0.039\" L x 0.020\" W (1.00mm x 0.50mm)", Unit Price (USD)=0.00350
R6: library part ERJ-2GEJ102X, "RES SMD 1K OHM 5% 1/10W 0402", Digi-Key Part Number=P1.0KJCT-ND, Manufacturer="Panasonic Electronic Components", Operating Temperature="-55°C ~ 155°C", Package / Case="0402 (1005 Metric)", Power (Watts)="0.1W, 1/10W", Supplier Device Package=0402, Temperature Coefficient=±200ppm/°C, Tolerance=±5%, @ qty=1500, Composition="Thick Film", Datasheets=http://industrial.panasonic.com/www-cgi/jvcr13pz.cgi?E+PZ+3+AOA0001+ERJ2GEJ102X+7+WW, Factory Stock=0, Failure Rate=-, Features="Automotive AEC-Q200", Height - Seated (Max)="0.016\" (0.40mm)", Image=//media.digikey.com/Photos/Panasonic%20Photos/ERJ-PA2-Series.jpg, Minimum Quantity=1, Number of Terminations=2, Packaging="Cut Tape (CT)", Part Number=ERJ-2GEJ102X, Part Status=Active, Quantity Available=1939857, Series=ERJ, Size / Dimension="0.039\" L x 0.020\" W (1.00mm x 0.50mm)", Unit Price (USD)=0.00350
R7: library part ERJ-2GEJ164X, "RES SMD 160K OHM 5% 1/10W 0402", Digi-Key Part Number=P160KJCT-ND, Manufacturer="Panasonic Electronic Components", Operating Temperature="-55°C ~ 155°C", Package / Case="0402 (1005 Metric)", Power (Watts)="0.1W, 1/10W", Supplier Device Package=0402, Temperature Coefficient=±200ppm/°C, Tolerance=±5%, @ qty=1500, Composition="Thick Film", Datasheets=http://industrial.panasonic.com/www-cgi/jvcr13pz.cgi?E+PZ+3+AOA0001+ERJ2GEJ164X+7+WW, Factory Stock=0, Failure Rate=-, Features="Automotive AEC-Q200", Height - Seated (Max)="0.016\" (0.40mm)", Image=//media.digikey.com/Photos/Panasonic%20Photos/ERJ-PA2-Series.jpg, Minimum Quantity=1, Number of Terminations=2, Packaging="Cut Tape (CT)", Part Number=ERJ-2GEJ164X, Part Status=Active, Quantity Available=64191, Series=ERJ, Size / Dimension="0.039\" L x 0.020\" W (1.00mm x 0.50mm)", Unit Price (USD)=0.00350
R9 R11 R12 R13 R16: library part ERJ-2GEJ103X, "RES SMD 10K OHM 5% 1/10W 0402", Digi-Key Part Number=P10KJCT-ND, Manufacturer="Panasonic Electronic Components", Operating Temperature="-55°C ~ 155°C", Package / Case="0402 (1005 Metric)", Power (Watts)="0.1W, 1/10W", Supplier Device Package=0402, Temperature Coefficient=±200ppm/°C, Tolerance=±5%, @ qty=1500, Composition="Thick Film", Datasheets=http://industrial.panasonic.com/www-cgi/jvcr13pz.cgi?E+PZ+3+AOA0001+ERJ2GEJ103X+7+WW, Factory Stock=0, Failure Rate=-, Features="Automotive AEC-Q200", Height - Seated (Max)="0.016\" (0.40mm)", Image=//media.digikey.com/Photos/Panasonic%20Photos/ERJ-PA2-Series.jpg, Minimum Quantity=1, Number of Terminations=2, Packaging="Cut Tape (CT)", Part Number=ERJ-2GEJ103X, Part Status=Active, Quantity Available=2560215, Series=ERJ, Size / Dimension="0.039\" L x 0.020\" W (1.00mm x 0.50mm)", Unit Price (USD)=0.00350
R10: library part ERJ-2GEJ103X, "RES SMD 0K OHM 5% 1/10W 0402", Digi-Key Part Number=P10KJCT-ND, Manufacturer="Panasonic Electronic Components", Operating Temperature="-55°C ~ 155°C", Package / Case="0402 (1005 Metric)", Power (Watts)="0.1W, 1/10W", Supplier Device Package=0402, Temperature Coefficient=±200ppm/°C, Tolerance=±5%, @ qty=1500, Composition="Thick Film", Datasheets=http://industrial.panasonic.com/www-cgi/jvcr13pz.cgi?E+PZ+3+AOA0001+ERJ2GEJ103X+7+WW, Factory Stock=0, Failure Rate=-, Features="Automotive AEC-Q200", Height - Seated (Max)="0.016\" (0.40mm)", Image=//media.digikey.com/Photos/Panasonic%20Photos/ERJ-PA2-Series.jpg, Minimum Quantity=1, Number of Terminations=2, Packaging="Cut Tape (CT)", Part Number=ERJ-2GEJ103X, Part Status=Active, Quantity Available=2560215, Series=ERJ, Size / Dimension="0.039\" L x 0.020\" W (1.00mm x 0.50mm)", Unit Price (USD)=0.00350
R14 R17 R19 R20 R21 R22: library part ERJ-2GEJ103X, "RES SMD 100K OHM 5% 1/10W 0402", Digi-Key Part Number=P10KJCT-ND, Manufacturer="Panasonic Electronic Components", Operating Temperature="-55°C ~ 155°C", Package / Case="0402 (1005 Metric)", Power (Watts)="0.1W, 1/10W", Supplier Device Package=0402, Temperature Coefficient=±200ppm/°C, Tolerance=±5%, @ qty=1500, Composition="Thick Film", Datasheets=http://industrial.panasonic.com/www-cgi/jvcr13pz.cgi?E+PZ+3+AOA0001+ERJ2GEJ103X+7+WW, Factory Stock=0, Failure Rate=-, Features="Automotive AEC-Q200", Height - Seated (Max)="0.016\" (0.40mm)", Image=//media.digikey.com/Photos/Panasonic%20Photos/ERJ-PA2-Series.jpg, Minimum Quantity=1, Number of Terminations=2, Packaging="Cut Tape (CT)", Part Number=ERJ-2GEJ103X, Part Status=Active, Quantity Available=2560215, Series=ERJ, Size / Dimension="0.039\" L x 0.020\" W (1.00mm x 0.50mm)", Unit Price (USD)=0.00350
R15 R18: library part ERJ-2GEJ103X, "RES SMD 4.7K OHM 5% 1/10W 0402", Digi-Key Part Number=P10KJCT-ND, Manufacturer="Panasonic Electronic Components", Operating Temperature="-55°C ~ 155°C", Package / Case="0402 (1005 Metric)", Power (Watts)="0.1W, 1/10W", Supplier Device Package=0402, Temperature Coefficient=±200ppm/°C, Tolerance=±5%, @ qty=1500, Composition="Thick Film", Datasheets=http://industrial.panasonic.com/www-cgi/jvcr13pz.cgi?E+PZ+3+AOA0001+ERJ2GEJ103X+7+WW, Factory Stock=0, Failure Rate=-, Features="Automotive AEC-Q200", Height - Seated (Max)="0.016\" (0.40mm)", Image=//media.digikey.com/Photos/Panasonic%20Photos/ERJ-PA2-Series.jpg, Minimum Quantity=1, Number of Terminations=2, Packaging="Cut Tape (CT)", Part Number=ERJ-2GEJ103X, Part Status=Active, Quantity Available=2560215, Series=ERJ, Size / Dimension="0.039\" L x 0.020\" W (1.00mm x 0.50mm)", Unit Price (USD)=0.00350
R23: library part ERJ-2GEJ103X, "RES SMD 51.1K OHM 5% 1/10W 0402", Digi-Key Part Number=P10KJCT-ND, Manufacturer="Panasonic Electronic Components", Operating Temperature="-55°C ~ 155°C", Package / Case="0402 (1005 Metric)", Power (Watts)="0.1W, 1/10W", Supplier Device Package=0402, Temperature Coefficient=±200ppm/°C, Tolerance=±5%, @ qty=1500, Composition="Thick Film", Datasheets=http://industrial.panasonic.com/www-cgi/jvcr13pz.cgi?E+PZ+3+AOA0001+ERJ2GEJ103X+7+WW, Factory Stock=0, Failure Rate=-, Features="Automotive AEC-Q200", Height - Seated (Max)="0.016\" (0.40mm)", Image=//media.digikey.com/Photos/Panasonic%20Photos/ERJ-PA2-Series.jpg, Minimum Quantity=1, Number of Terminations=2, Packaging="Cut Tape (CT)", Part Number=ERJ-2GEJ103X, Part Status=Active, Quantity Available=2560215, Series=ERJ, Size / Dimension="0.039\" L x 0.020\" W (1.00mm x 0.50mm)", Unit Price (USD)=0.00350
S1: "Switch", Manufacturer_Name="C & K COMPONENTS", Mouser Part Number=611-PCM12SMTR, RS Part Number=7931721P, Allied_Number=70417448, Allied Price/Stock=https://www.alliedelec.com/c-k-pcm12smtr/70417448/, Datasheet Link=http://www.farnell.com/datasheets/1789487.pdf, Manufacturer_Part_Number=PCM12SMTR, Mouser Price/Stock=https://www.mouser.com/Search/Refine.aspx?Keyword=611-PCM12SMTR, RS Price/Stock=http://uk.rs-online.com/web/p/products/7931721P
U1: "Undefined or Miscellaneous", Manufacturer_Name="Amphenol Advanced Sensors", Mouser Part Number=527-ZTP-135SR, Allied_Number=70282698, Allied Price/Stock=https://www.alliedelec.com/amphenol-advanced-sensors-ztp-135sr/70282698/, Datasheet Link=https://www.amphenol-sensors.com/en/component/edocman/370-thermopile-ir-sensor-applications/download?Itemid=7967, Manufacturer_Part_Number=ZTP-135SR, Mouser Price/Stock=https://www.mouser.com/Search/Refine.aspx?Keyword=527-ZTP-135SR
Y2: library part FC-135_32.7680KA-A3, "Crystal or Oscillator", Manufacturer_Name="Epson Timing", Manufacturer_Part_Number="FC-135 32.7680KA-A5", Mouser Part Number=732-FC135-32.76KAA3, Datasheet Link=https://support.epson.biz/td/api/doc_check.php?dl=brief_fc-135r_en.pdf, Height=0mm, Mouser Price/Stock=https://www.mouser.com/Search/Refine.aspx?Keyword=732-FC135-32.76KAA3
Y3: "Crystal or Oscillator", Manufacturer_Name="Murata Electronics", Mouser Part Number=81-XRCGB32M000F1H01R, Datasheet Link=https://www.murata.com/en-eu/products/productdetail?partno=XRCGB32M000F1H01R0, Height=0.7mm, Manufacturer_Part_Number=XRCGB32M000F1H01R0, Mouser Price/Stock=https://www.mouser.com/Search/Refine.aspx?Keyword=81-XRCGB32M000F1H01R

## Via types
v1: diameter 0.4, hole 0.2, Top Layer to Bottom Layer, tented both sides, 123 vias
v2: diameter 0.6, hole 0.3, Top Layer to Bottom Layer, tented both sides, 2 vias
v3: diameter 0.35, hole 0.35, Top Layer to Bottom Layer, 1 vias

## Nets (pads, with @x,y where several pads share a name; then routed paths per layer and width w, separated by ;. In a path a pad name is that pad's centre, name@x,y a point inside that pad or via, vN(x,y) a via of type N, cw(c..) or ccw(c..) an arc to the next point about the centre after c; other vN are vias at no path point)
3.3V_MIC: C27.1 IC6.8 MK1.1 Q2.2 R20.1 | length 11.6
  Top Layer w0.127: R20.1@36.779,3.302 37.16,2.921 v1(38.735,2.921)
  Top Layer w0.152: v1(32.123,4.067) 32.154,4.036 32.28,4.036 C27.1@32.69,4.445
  Layer 2 w0.127: v1(32.123,4.067) 32.128,4.067 32.131,4.064 32.973,4.064 33.196,3.841 33.261,3.775 33.58,3.775 34.434,2.921 v1(38.735,2.921)
  Bottom Layer w0.102: IC6.8@38.295,3.072 38.394,2.973 38.63,2.973 38.681,2.921 v1(38.735,2.921)
  Bottom Layer w0.152: Q2.2@31.107,2.784 31.486,2.784 31.877,3.175 v1(31.877,3.429)
3.3V_PWR: AC1.3 AC1.28 C9.2 C10.1 C14.1 C16.1 C17.1 C21.2 C23.1 C24.2 C25.2 C26.1 CN1.1 IC3.13 IC3.14 IC4.1 IC4.5 IC4.17 IC5.6 Q2.3 R8.1 R9.2 R11.2 R12.2 R14.1 R16.2 | length 26
  Top Layer w0.152: R14.1@25.622,6.318 26.416,5.524 v1(26.416,5.12) v1@26.416,5.08 ; R11.2@25.654,1.6 25.73,1.524 v1(26.162,1.524) ; v1(37.846,2.032) 37.705,2.032 37.773,2.1 37.773,2.113 38.105,2.113 R9.2@38.278,2.286 ; AC1.28@40.344,3.486 40.393,3.535 40.673,3.535 40.822,3.683 v1(41.148,3.683) 41.607,3.224 41.607,2.972 AC1.3@41.656,2.923 41.705,2.972 AC1.3@41.705,3.189
  Top Layer w0.254: IC5.6@0.922,5.715 0.922,5.913 0.954,5.913 1.12,6.079 1.12,6.135 1.143,6.157 1.143,6.201 1.292,6.35 v1(2.54,6.35) 2.549,6.341 2.549,6.275 2.69,6.135 2.69,5.896 C14.1@2.921,5.664 ; v1(19.519,4.988) 19.547,5.016 19.761,5.016 19.826,5.08 C26.1@20.371,5.08 C25.2@20.371,5.969 ; v1(19.685,1.905) R12.2@20.244,1.905
  Bottom Layer w0.152: IC4.17@25.444,5.967 25.448,5.967 25.577,5.838 25.755,5.838 25.772,5.821 26.001,5.821 26.09,5.732 26.09,5.711 26.141,5.66 C23.1@26.341,5.66 ; R8.1@29.464,1.067 30.443,1.067 30.607,1.231 Q2.3@30.607,1.257 ; Q2.3@30.607,1.28 Q2.3@30.607,1.257 ; CN1.1@32.687,1.093 32.523,1.257 Q2.3@30.607,1.257 ; v1(41.148,3.683) 41.275,3.556 41.577,3.556 ; R16.2@41.351,3.048 41.483,3.18 41.483,3.462 41.577,3.556 ; C17.1@42.085,3.302 41.831,3.556 41.577,3.556 ; C16.1@42.085,4.064 41.577,3.556
  Bottom Layer w0.203: IC4.17@25.146,5.969 25.442,5.969 IC4.17@25.444,5.967
  Bottom Layer w0.254: IC3.13@1.363,5.573 IC3.14@1.363,6.223 1.386,6.246 2.396,6.246 2.5,6.35 v1(2.54,6.35) 2.54,6.642 ; C10.1@2.235,7.493 2.235,6.947 2.54,6.642 ; C9.2@3.099,7.493 3.099,7.036 2.623,6.56 2.54,6.642 ; v1(19.519,4.988) 19.547,4.96 19.547,4.794 19.726,4.615 19.804,4.615 19.95,4.469 IC4.5@20.246,4.469 ; v1(19.685,1.905) 19.657,1.933 19.657,2.009 C21.2@19.304,2.362 19.411,2.469 IC4.1@20.246,2.469 ; v1(26.416,5.12) 26.341,5.195 26.341,5.66 26.395,5.66 26.543,5.512 C24.2@27.178,5.512
5V: C6.1 IC2.1 IC2.2 J1.4 J2.5 R4.2 | length 6.8
  Top Layer w0.152: J1.4@8.108,1.822 8.108,1.29 v1(8.128,1.27) ; J2.5@35.179,5.789 J2.5@35.3,5.91
  Layer 1 w0.203: v1(42.526,6.886) 42.526,6.281 42.945,5.861 42.926,5.842
  Layer 1 w0.406: 35.392,5.769 35.559,5.936 v1(35.559,6.1)
  Bottom Layer w0.152: R4.2@44.145,4.699 R4.2@44.323,4.877
  Bottom Layer w0.203: IC2.1@42.243,7.366 IC2.2@42.243,6.934 42.243,6.866 42.269,6.84 42.782,6.84 ; v1(42.526,6.886) 42.736,6.886 42.782,6.84 ; C6.1@44.072,6.144 43.658,6.558 43.064,6.558 42.972,6.65 ; R4.2@44.323,4.877 C6.1@44.323,5.893 ; 42.782,6.84 42.972,6.65 ; 42.782,6.84 42.972,6.65
AFE_A0: IC3.4 R7.1 | length 4.2
  Bottom Layer w0.102: IC3.4@7.239,4.273 8.972,4.273 9.554,4.855 10.316,4.855 10.63,5.169 10.63,5.373 R7.1@10.795,5.537
AFE_A1: C15.1 IC3.5 R7.2 | length 3.9
  Bottom Layer w0.152: IC3.5@7.239,3.623 8.204,3.623 8.218,3.637 8.717,3.637 9.449,4.369 C15.1@9.906,4.369 R7.2@10.795,4.369
ANALOG_EXP_CONN: CN1.3 IC4.9 TP18.1 | length 22.2
  Top Layer w0.102: v1(20.701,6.858) 20.782,6.858 20.938,6.702 22.057,6.702 22.086,6.731 24.074,6.731 24.495,6.31 25.021,6.31 25.081,6.37 25.081,6.381 25.559,6.859 25.685,6.859 26.294,6.25 27.09,6.25 27.149,6.31 27.149,6.75 27.051,6.848 27.051,7.318 27.065,7.332 v1(27.065,7.348)
  Bottom Layer w0.102: v1(20.701,6.858) 20.872,6.858 20.946,6.784 IC4.9@20.946,6.669 ; v1(27.065,7.348) 27.074,7.357 27.55,7.357 27.563,7.37 27.893,7.37 27.963,7.44 28.747,7.44 28.801,7.386 ; 28.805,7.39 29.37,6.825 29.37,6.33 29.769,5.932 29.769,5.48 30.988,4.261 30.988,3.316 30.842,3.17 30.842,2.398 30.931,2.309 31.05,2.19 32.804,2.19 33.11,1.884 34.373,1.884 35.114,1.143 CN1.3@35.687,1.143
  Bottom Layer w0.152: v1@20.736,7.02 IC4.9@20.885,6.871 ; v1@20.799,6.956 IC4.9@20.885,6.871 ; IC4.9@20.946,6.784 20.946,6.809 IC4.9@20.885,6.871
BOOT0: IC4.31 J2.4 R13.2 TP26.1 | length 24
  Top Layer w0.102: v1(26.289,0.635) 26.289,1.143 26.67,1.524 29.083,1.524 31.496,3.937 31.623,3.937 v1(31.626,3.934) ; v1(30.226,7.465) 30.239,7.478 30.323,7.478 30.435,7.366 31.625,7.366 31.711,7.28 32.003,7.28 32.209,7.487 32.209,7.571 32.294,7.656 32.931,7.656 33.221,7.366 33.909,7.366 J2.4@33.909,7.059
  Bottom Layer w0.102: R13.2@21.412,0.635 22.106,0.635 22.358,0.383 25.781,0.383 ; 26.037,0.383 26.996,0.383 27.121,0.508 TP26.1@28.067,0.508 ; v1(30.226,7.465) 30.226,7.268 30.133,7.175 30.133,6.409 30.175,6.367 30.175,5.893 30.983,5.085 31.161,5.085 31.367,4.879 31.367,4.32 31.569,4.118 31.569,3.991 v1(31.626,3.934)
  Bottom Layer w0.127: 25.781,0.383 26.037,0.383 v1(26.289,0.635)
  Bottom Layer w0.152: R13.2@21.412,0.635 21.446,0.669 IC4.31@21.446,1.769
CMOUT: C8.1 C11.1 C12.2 C15.2 IC3.3 J1.12 TP8.1 TP15.1 U1.2 | length 42.2
  Top Layer w0.102: v1(5.461,3.429) 5.461,3.048 6.096,2.413 J1.12@6.096,2.286 ; v1(19.24,7.54) 19.24,7.59 19.66,8.01 26.761,8.01 26.821,7.95 27.44,7.95 28.22,7.17 28.22,7.108 v1(28.24,7.088)
  Bottom Layer w0.102: C12.2@10.795,6.528 C12.2@10.945,6.678 ; 11.887,6.777 11.901,6.777 ; TP15.1@14.224,7.239 14.224,7.57 14.224,7.593 14.715,7.593 14.84,7.718 15.132,7.718 15.171,7.679 15.208,7.679 ; 18.288,7.679 18.339,7.629 ; 29.337,4.926 29.337,5.753
  Bottom Layer w0.152: v1(5.461,3.429) 5.461,3.683 5.013,4.131 5.013,5.05 5.257,5.295 5.266,5.295 5.511,5.54 ; TP8.1@6.096,6.985 6.477,6.985 ; C11.1@8.763,7.696 8.436,7.369 7.617,7.369 7.493,7.493 7.086,7.493 6.604,7.011 6.604,6.985 6.477,6.985 ; C8.1@9.779,6.528 C12.2@10.795,6.528 ; C12.2@10.945,6.678 11.504,6.678 ; 11.887,6.777 11.788,6.678 11.504,6.678 ; 11.901,6.777 11.982,6.858 12.116,6.858 12.828,7.57 14.224,7.57 ; 15.208,7.679 18.288,7.679 ; 18.339,7.629 19.151,7.629 v1(19.24,7.54) ; U1.2@27.23,4.127 27.291,4.066 28.605,4.066 28.941,4.403 28.941,4.53 29.337,4.926 ; v1(28.24,7.088) 28.222,7.07 28.222,6.868 29.337,5.753 ; 5.511,5.54 5.54,5.54 5.969,5.969 5.969,5.334 6.362,4.941 7.221,4.941 IC3.3@7.239,4.923 7.463,4.699 9.075,4.699 9.345,4.969 9.345,4.976 9.452,5.083 9.554,5.083 9.776,5.305 9.776,5.407 10.105,5.736 10.192,5.736 10.342,5.886 10.529,6.073 11.207,6.073 11.504,6.369 11.504,6.678 ; 5.511,5.54 5.969,5.998 5.969,6.477 6.477,6.985
EXPANSION_INT: IC4.11 J1.5 TP5.1 | length 22.2
  Top Layer w0.102: J1.5@7.608,7.322 7.623,7.307 7.623,6.679 8.449,5.852 8.504,5.852 8.934,5.422 8.934,5.321 8.934,3.512 9.017,3.429 10.984,3.429 11.579,4.024 11.579,4.14 11.794,4.354 12.075,4.354 12.664,4.354 v1(12.954,4.064)
  Bottom Layer w0.102: TP5.1@13.335,4.445 v1(12.954,4.064) 12.954,4.051 13.014,3.991 15.157,3.991 15.621,4.455 15.621,5.016 15.387,5.251 15.387,5.295 15.249,5.432 15.249,5.93 16.466,7.146 17.404,7.146 17.43,7.121 18.564,7.121 18.707,6.977 19.613,6.977 19.677,7.04 19.749,7.04 19.92,7.211 20.165,7.211 20.419,7.465 21.615,7.465 21.821,7.26 21.821,7.225 21.911,7.135 v1(21.911,7.055)
  Bottom Layer w0.152: v1(21.911,7.055) 21.969,7.055 21.969,6.983 21.946,6.96 IC4.11@21.946,6.669